# EAGLE board ACB-Lite 3.0 (EAGLE 8.6.3), part 1 of 2
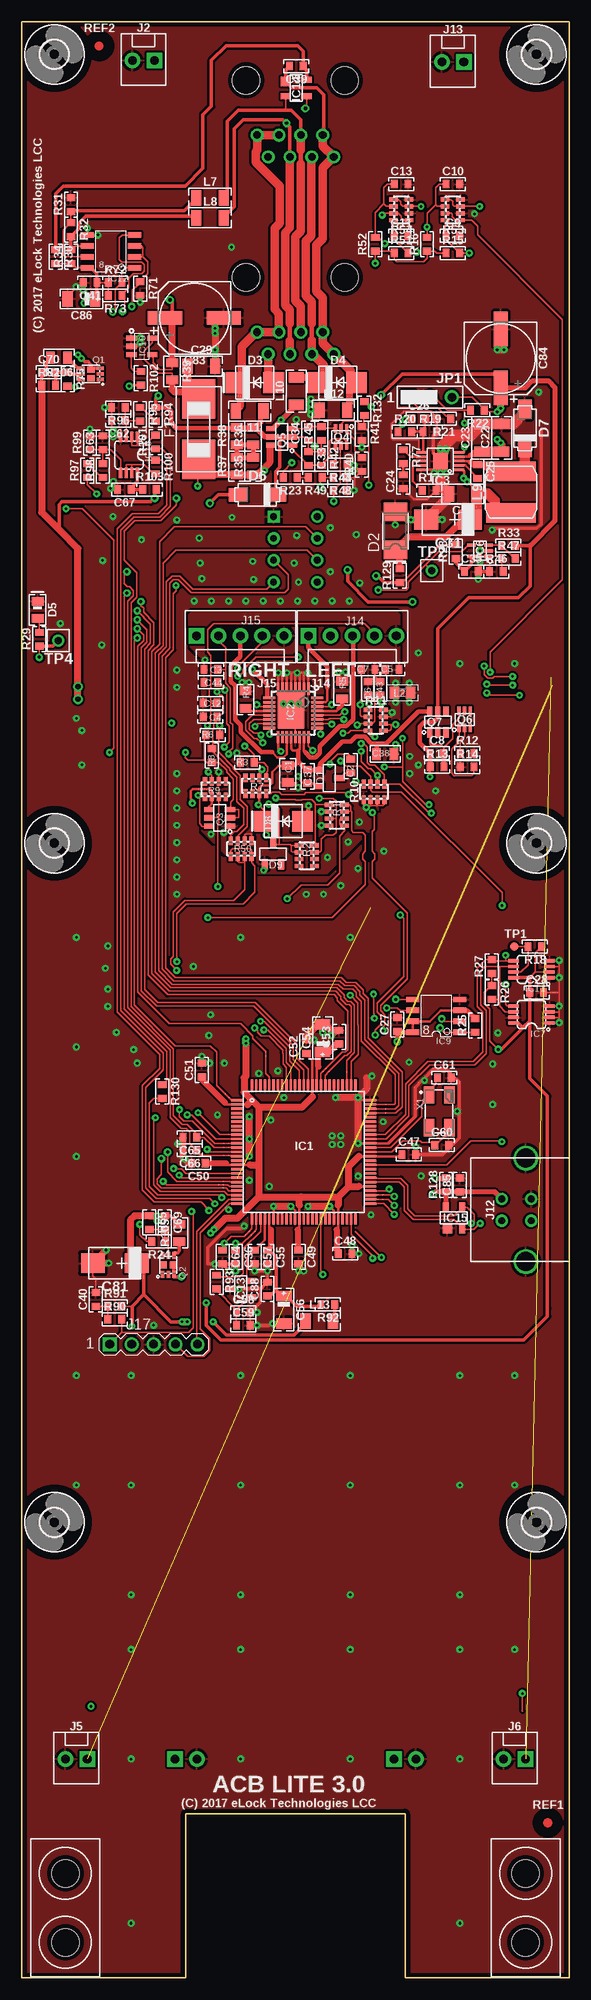
[diagram p0: board, top side]
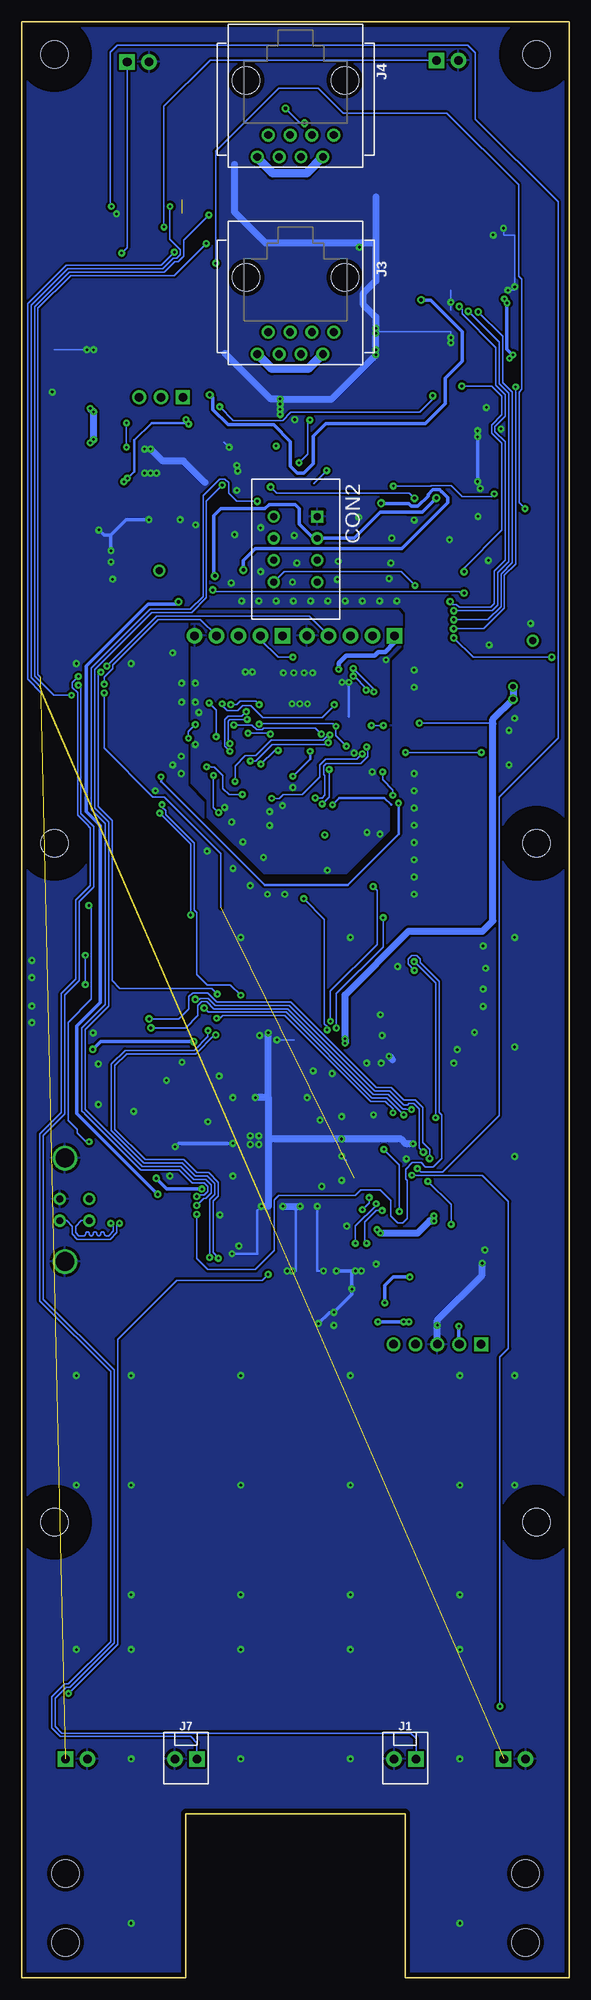
[diagram p1: board, bottom side, seen from below]

Size 63.5 x 226.82 mm. Coordinates in mm from the lower left corner, seen from the top.
Outline: 63.5,0 63.5,226.82 0,226.82 0,0 19.05,0 19.05,19.05 44.45,19.05 44.45,0 63.5,0
Copper layers (1*16): Top 0.035mm / dielectric 1.5mm / Bottom 0.035mm
Design rules "default *": minimum track width 0.2mm, minimum drill 0.3mm, track to track 0.2mm, track to pad 0.2mm, pad to pad 0.2mm, via to via 0.2mm, smd to smd 0.001mm, copper to edge 0.5mm, drill to drill 0.2mm, minimum pad ring 0.3mm, minimum via ring 0.25mm, stop-mask expansion 0.1mm, vias tented up to drill 0.6mm, thermal gap 0.35mm
Net classes: 1 HV: clearance 0.3 mm to class 0

## Footprints (pad centres in the part's own frame; a part is rotated, then mirrored left to right if it is on the bottom)
0805 = smd 0.99 x 1.39: 1 -1,0; 2 1,0
0603 = smd 0.79 x 0.99: 1 -0.8,0; 2 0.8,0
1206 = smd 1.19 x 1.79: 1 -1.6,0; 2 1.6,0
CT-C = smd 2.743 x 2.311: + -2.54,0; - 2.54,0
1206-POL-C = smd 1.19 x 1.79: + -1.6,0; - 1.6,0
CAP_8MM_DIA_SMT = smd 1.59 x 3.99: 1 0,3.4; 2 0,-3.4
166087-4 = drill 0.8 square: 1 -3.81,2.54 | drill 0.8: 2 -1.27,2.54; 3 1.27,2.54; 4 3.81,2.54; 5 3.81,-2.54; 6 1.27,-2.54; 7 -1.27,-2.54; 8 -3.81,-2.54
SOT-23 = smd 0.69 x 1.19: 1 0.95,1.2; 2 -0.95,1.2; 3 0,-1.2
SMA = smd 2.159 x 2.743: + -2.311,0.003; - 2.108,-0.002
SMB = smd 2.4 x 2.4: A 2.2,0; C -2.2,0
0805-POL-D = smd 0.99 x 1.39: A 1,0; K -1,0
SMA' = smd 2.21 x 1.575: A -2.223,0; K 2.223,0
LITTLEFUSE0154 = smd 4.6 x 3.8: 1 3.5,0; 2 -3.5,0
CAM-HOLDER = hole 3.2: 0,4; 0,-4
3,2 = hole 3.2: 0,0
TQFP100_14X14_0,5MM = smd 1.39 x 0.28: 1 -7.7,6; 2 -7.7,5.5; 3 -7.7,5; 4 -7.7,4.5; 5 -7.7,4; 6 -7.7,3.5; 7 -7.7,3; 8 -7.7,2.5; 9 -7.7,2; 10 -7.7,1.5; 11 -7.7,1; 12 -7.7,0.5; 13 -7.7,0; 14 -7.7,-0.5; 15 -7.7,-1; 16 -7.7,-1.5; 17 -7.7,-2; 18 -7.7,-2.5; 19 -7.7,-3; 20 -7.7,-3.5; 21 -7.7,-4; 22 -7.7,-4.5; 23 -7.7,-5; 24 -7.7,-5.5; 25 -7.7,-6; 51 7.7,-6; 52 7.7,-5.5; 53 7.7,-5; 54 7.7,-4.5; 55 7.7,-4; 56 7.7,-3.5; 57 7.7,-3; 58 7.7,-2.5; 59 7.7,-2; 60 7.7,-1.5; 61 7.7,-1; 62 7.7,-0.5; 63 7.7,0; 64 7.7,0.5; 65 7.7,1; 66 7.7,1.5; 67 7.7,2; 68 7.7,2.5; 69 7.7,3; 70 7.7,3.5; 71 7.7,4; 72 7.7,4.5; 73 7.7,5; 74 7.7,5.5; 75 7.7,6 | smd 0.28 x 1.39: 26 -6,-7.7; 27 -5.5,-7.7; 28 -5,-7.7; 29 -4.5,-7.7; 30 -4,-7.7; 31 -3.5,-7.7; 32 -3,-7.7; 33 -2.5,-7.7; 34 -2,-7.7; 35 -1.5,-7.7; 36 -1,-7.7; 37 -0.5,-7.7; 38 0,-7.7; 39 0.5,-7.7; 40 1,-7.7; 41 1.5,-7.7; 42 2,-7.7; 43 2.5,-7.7; 44 3,-7.7; 45 3.5,-7.7; 46 4,-7.7; 47 4.5,-7.7; 48 5,-7.7; 49 5.5,-7.7; 50 6,-7.7; 76 6,7.7; 77 5.5,7.7; 78 5,7.7; 79 4.5,7.7; 80 4,7.7; 81 3.5,7.7; 82 3,7.7; 83 2.5,7.7; 84 2,7.7; 85 1.5,7.7; 86 1,7.7; 87 0.5,7.7; 88 0,7.7; 89 -0.5,7.7; 90 -1,7.7; 91 -1.5,7.7; 92 -2,7.7; 93 -2.5,7.7; 94 -3,7.7; 95 -3.5,7.7; 96 -4,7.7; 97 -4.5,7.7; 98 -5,7.7; 99 -5.5,7.7; 100 -6,7.7
SQFP-S-5X5-32 = smd 0.3 x 1.4: 1 -1.75,-2.8; 2 -1.25,-2.8; 3 -0.75,-2.8; 4 -0.25,-2.8; 5 0.25,-2.8; 6 0.75,-2.8; 7 1.25,-2.8; 8 1.75,-2.8; 17 1.75,2.8; 18 1.25,2.8; 19 0.75,2.8; 20 0.25,2.8; 21 -0.25,2.8; 22 -0.75,2.8; 23 -1.25,2.8; 24 -1.75,2.8 | smd 1.4 x 0.3: 9 2.8,-1.75; 10 2.8,-1.25; 11 2.8,-0.75; 12 2.8,-0.25; 13 2.8,0.25; 14 2.8,0.75; 15 2.8,1.25; 16 2.8,1.75; 25 -2.8,1.75; 26 -2.8,1.25; 27 -2.8,0.75; 28 -2.8,0.25; 29 -2.8,-0.25; 30 -2.8,-0.75; 31 -2.8,-1.25; 32 -2.8,-1.75 | smd 3.1 x 4.3: G 0.25,-0.35
MSOP10EXP = smd 0.29 x 1.19: 1 -1,-2.2; 2 -0.5,-2.2; 3 0,-2.2; 4 0.5,-2.2; 5 1,-2.2; 6 1,2.2; 7 0.5,2.2; 8 0,2.2; 9 -0.5,2.2; 10 -1,2.2 | smd 1.88 x 1.68: EP 0,0
SC-70-5 = smd 0.39 x 0.99: 1 -0.65,-1; 2 0,-1; 3 0.65,-1; 4 0.65,1; 5 -0.65,1
MSOP-08 = smd 0.38 x 1.2: 1 -1,-2.1; 2 -0.35,-2.1; 3 0.3,-2.1; 4 0.95,-2.1; 5 0.95,2.1; 6 0.3,2.1; 7 -0.35,2.1; 8 -1,2.1
SO-08 = smd 0.61 x 1.524: 1 -1.905,-2.743; 2 -0.635,-2.743; 3 0.635,-2.743; 4 1.905,-2.743; 5 1.905,2.743; 6 0.635,2.743; 7 -0.635,2.743; 8 -1.905,2.743
SOT23-5 = smd 0.6 x 1.2: 1 -0.95,-1.206; 2 0,-1.206; 3 0.95,-1.206; 4 0.95,1.206; 5 -0.95,1.206
SO08 = smd 0.61 x 1.524: 1 -1.905,-2.743; 2 -0.635,-2.743; 3 0.635,-2.743; 4 1.905,-2.743; 5 1.905,2.743; 6 0.635,2.743; 7 -0.635,2.743; 8 -1.905,2.743
SOT23 = smd 0.69 x 1.19: 1 0.95,1.2; 2 -0.95,1.2; 3 0,-1.2
SOT-143 = smd 1.09 x 1.19: 1 -0.75,-1.2 | smd 0.69 x 1.19: 2 0.95,-1.2; 3 0.95,1.2; 4 -0.95,1.2
3-641215-2 = drill 1 pad 1.8 square: 1 1.27,0 | drill 1 pad 1.8: 2 -1.27,0
RJ8-8-180 = drill 0.9 pad 1.4: 1 -4.445,6.35; 2 -3.175,8.89; 3 -1.905,6.35; 4 -0.635,8.89; 5 0.635,6.35; 6 1.905,8.89; 7 3.175,6.35; 8 4.445,8.89 | hole 3.2: 5.715,0; -5.715,0
USB_B_180 = drill 0.8 pad 1.4: 1_+5V 1.25,2.8; 2_D- -1.25,2.8; 3_D+ -1.25,-0.6; 4_GND 1.25,-0.6 | drill 2.2 pad 2.8: SH1 -6,0; SH2 6,0
3-641215-5 = drill 1 pad 1.8 square: 1 5.08,0 | drill 1 pad 1.8: 2 2.54,0; 3 0,0; 4 -2.54,0; 5 -5.08,0
MA05-1 = drill 1 pad 1.6 square: 1 -5.08,0 | drill 1 pad 1.6: 2 -2.54,0; 3 0,0; 4 2.54,0; 5 5.08,0
JP3CLOSE12 = drill 1 pad 1.626 square: 1 -2.54,0 | drill 1 pad 1.626: 2 0,0; 3 2.54,0
0805-0RTOP = smd 1.092 x 1.397: 1 -0.94,0; 2 0.94,0
NR6028 = smd 2.3 x 5.7: 1 2.4,0; 2 -2.4,0
TEMP-PAD = smd 0.2 x 0.2: P$1 0,0
MICRO_FET = smd 0.4 x 0.8: 1 -0.65,-1.1; 2 0,-1.1; 3 0.65,-1.1; 4 0.65,1.1; 5 0,1.1; 6 -0.65,1.1 | smd 0.7 x 0.86: P1 -0.5,0; P2 0.5,0
SSOT-6 = smd 0.6 x 1.2: 1 -0.95,-1.2; 2 0,-1.2; 3 0.95,-1.206; 4 0.95,1.2; 5 0,1.2; 6 -0.95,1.2
SC70-6 = smd 0.39 x 0.99: 1 -0.65,-1; 2 0,-1; 3 0.65,-1; 4 0.65,1; 5 0,1; 6 -0.65,1
0603-ARRAY = smd 0.49 x 0.99: 1 -1.2,-0.9; 2 -0.4,-0.9; 3 0.4,-0.9; 4 1.2,-0.9; 5 1.2,0.9; 6 0.4,0.9; 7 -0.4,0.9; 8 -1.2,0.9
SMD_ROUND_1MM = smd 1 x 1: P$1 0,0
TH_ROUND_14MM08MM = drill 0.8 pad 1.4: P$1 0,0
7B = smd 2 x 1.2: 1 -1.9,-1.2; 2 1.9,-1.2; 3 1.9,1.2; 4 -1.9,1.2

## Placement (x,y rotation side)
C1  4.7u/16V  [0805]  30.86,139.62 270 top
C2  10nF  [0603]  38.16,140.52 90 top
C3  10nF  [0603]  21.96,151.72 180 top
C4  10nF  [0603]  21.86,146.22 180 top
C5  10nF  [0603]  42.96,151.72 0 top
C6  10nF  [0603]  40.16,149.52 90 top
C7  10nF  [0603]  40.16,151.72 0 top
C8  100n  [0603]  48.15,142 0 top
C9  10nF  [0603]  50,201.99 0 top
C10  10nF  [0603]  50,207.99 0 top
C11  10nF  [0603]  44,201.99 0 top
C12  10nF  [0603]  21.86,147.82 180 top
C13  10nF  [0603]  44,207.99 0 top
C22  4u7/50  [1206]  55.64,178.57 90 top
C23  4u7/50  [1206]  53.34,178.57 90 top
C24  1n  [0603]  44.24,173.47 90 top
C25  470n/25  [0603]  52.84,174.67 270 top
C26  10p  [0603]  46.04,180.77 0 top
C27  100n  [0603]  43.57,110.55 90 top
C28  100n  [0603]  59.71,114.27 0 top
C29  4u7/50  [1206]  20.84,186.87 0 top
C30  47u/6.3  [1206]  51.14,172.07 180 top
C31  47uTC  [CT-C]  49.44,169.07 180 top
C33  100n  [0603]  33.24,176.17 270 top
C34  1n  [0603]  33.24,179.07 90 top
C35  100n  [0603]  52.14,163.07 0 top
C36  100n  [0603]  24.81,83.57 270 top
C37  1u/16V  [0603]  33.16,139.32 270 top
C38  4.7u/16V  [0805]  42.16,141.92 0 top
C39  100n  [0603]  31.85,221.65 180 top
C40  100n  [0603]  8.61,78.67 90 top
C41  100n  [0603]  7.94,196.57 180 top
C43  10nF  [0603]  41.56,149.52 90 top
C44  10nF  [0603]  21.96,150.22 180 top
C47  100n  [0603]  44.91,95.47 0 top
C48  1u  [0603]  37.51,83.97 0 top
C49  100n  [0603]  32.11,83.57 270 top
C50  1u  [0603]  20.51,94.47 180 top
C51  100n  [0603]  20.91,105.27 90 top
C52  1u  [0603]  33.01,107.97 90 top
C53  10u  [0603]  36.81,109.07 90 top
C54  10uTA  [1206-POL-C]  34.91,108.97 90 top
C55  100n  [0603]  28.51,83.57 270 top
C56  10uTA  [1206-POL-C]  30.41,77.47 270 top
C57  100n->10n  [0603]  27.01,83.57 270 top
C58  100n  [0603]  25.71,77.17 0 top
C59  1u->100n  [0603]  25.71,75.67 0 top
C60  18p  [0603]  48.71,96.57 0 top
C61  18p  [0603]  49.01,104.37 0 top
C62  1n  [0603]  11.23,180.58 180 top
C63  1n  [0603]  9.43,177.98 90 top
C64  100n  [0603]  23.31,83.57 270 top
C65  1n  [0603]  19.51,97.47 180 top
C66  10n  [0603]  19.51,95.97 180 top
C67  10u  [0603]  11.93,172.58 180 top
C69  1n  [0603]  16.61,87.57 270 top
C70  1n  [0603]  3.14,186.17 0 top
C81  47uTC  [CT-C]  10.81,82.87 180 top
C83  220u/25V  [CAP_8MM_DIA_SMT]  20.04,192.47 90 top
C84  220u/25V  [CAP_8MM_DIA_SMT]  55.54,187.77 180 top
C85  100n  [0603]  50.81,91.94 90 top
C86  10uTA  [1206-POL-C]  6.94,194.67 180 top
C88  10u  [0603]  28.51,79.87 90 top
CON2  166087-4  [166087-4]  31.75,165.64 270 bottom
D1  BAT54S  [SOT-23]  35.66,139.12 90 top
D2  SMLVT3V3  [SMA]  43.34,167.87 90 top
D3  P6SMB20A  [SMB]  27.04,184.97 0 top
D4  P6SMB20A  [SMB]  36.64,184.97 0 top
D5  LED-GREEN  [0805-POL-D]  1.86,158.62 270 top
D6  SS14  [SMA']  27.34,171.97 0 top
D7  SS14  [SMA']  58.34,179.67 270 top
D8  P6SMB16A  [SMB]  30.36,134.12 0 top
D9  BZX84C6V2  [SOT-23]  29.16,130.32 180 top
F1  T1A-LITTLEFUSE0154  [LITTLEFUSE0154]  20.54,179.57 90 top
H1  CAM-HOLDER  [CAM-HOLDER]  58.42,8.13 0 top
H2  CAM-HOLDER  [CAM-HOLDER]  5.08,8.13 0 top
H3  MOUNT-HOLE3.2  [3,2]  3.81,223.01 0 top
H4  MOUNT-HOLE3.2  [3,2]  59.69,223.01 0 top
H5  MOUNT-HOLE3.2  [3,2]  3.81,131.57 0 top
H6  MOUNT-HOLE3.2  [3,2]  59.69,131.57 0 top
H7  MOUNT-HOLE3.2  [3,2]  3.81,52.83 0 top
H8  MOUNT-HOLE3.2  [3,2]  59.69,52.83 0 top
IC1  PIC32MX470F512L-I/PF  [TQFP100_14X14_0,5MM]  32.71,95.77 0 top
IC2  L6227Q  [SQFP-S-5X5-32]  31.49,146.66 180 top
IC3  LT3971EMSE  [MSOP10EXP]  48.54,175.87 90 top
IC6  MIC841LYC  [SC-70-5]  53.14,165.47 90 top
IC7  24LC32A-I/MS  [MSOP-08]  59.11,111.72 90 top
IC9  AT25SF321-SSHD  [SO-08]  48.07,111.55 90 top
IC10  MAX9938HEUK+T  [SOT23-5]  13.94,189.17 270 top
IC11  24LC32A-I/MS  [MSOP-08]  59.11,116.97 90 top
IC12  SN65HVD12D  [SO08]  10.34,200.17 90 top
IC13  REF3025  [SOT23]  25.41,79.87 270 top
IC14  TPD2E001DZDR  [SOT-143]  31.83,219.13 270 top
IC15  TPD2E001DZDR  [SOT-143]  50.11,88.14 0 top
IC16  MCP6042-I/MS  [MSOP-08]  12.43,176.58 180 top
J1  3-641215-2  [3-641215-2]  19.05,25.39 0 bottom
J2  3-641215-2  [3-641215-2]  14.13,222.33 0 top
J3  RJ8-8-180  [RJ8-8-180]  31.75,197.15 180 bottom
J4  RJ8-8-180  [RJ8-8-180]  31.75,220.02 180 bottom
J5  3-641215-2  [3-641215-2]  6.35,25.39 0 top
J6  3-641215-2  [3-641215-2]  57.15,25.39 0 top
J7  3-641215-2  [3-641215-2]  44.45,25.39 0 bottom
J12  USB_A_180  [USB_B_180]  58.47,89.05 90 top
J13  3-641215-2  [3-641215-2]  49.99,222.14 0 top
J14  3-641215-5  [3-641215-5]  38.36,155.62 180 top
J15  3-641215-5  [3-641215-5]  25.36,155.62 180 top
J17  DNP-open-hole  [MA05-1]  15.31,73.47 0 top
JP1  JP3CLOSE12  [JP3CLOSE12]  47.34,183.27 0 top
L2  DNP  [0805-0RTOP]  44.16,149.02 0 top
L7  HI1206T500R  [1206]  21.84,206.37 0 top
L8  HI1206T500R  [1206]  21.84,204.07 0 top
L9  NR6028T4R7M  [NR6028]  56.74,172.27 90 top
L10  HI1206T500R  [1206]  31.84,183.97 90 top
L11  HI1206T500R  [1206]  26.44,181.67 180 top
L12  HI1206T500R  [1206]  36.14,181.77 0 top
L13  LQM31PN3R3M00L  [1206]  34.51,76.17 0 top
O1  PIC-OUT  [TEMP-PAD]  24.01,102.07 0 top
O5  PIC-RPX  [TEMP-PAD]  24.01,97.77 0 top
O6  PIC-RPX  [TEMP-PAD]  24.01,96.77 0 top
O7  PIC-RPX  [TEMP-PAD]  24.01,96.27 0 top
O8  PIC-RPX  [TEMP-PAD]  24.01,95.37 0 top
O12  PIC-RPX  [TEMP-PAD]  23.41,92.37 0 top
O13  PIC-RPX  [TEMP-PAD]  23.41,91.57 0 top
O15  PIC-RPX  [TEMP-PAD]  26.41,86.57 90 top
O16  PIC-RPX  [TEMP-PAD]  27.01,86.57 0 top
O23  PIC-OUT  [TEMP-PAD]  28.31,106.87 0 top
O29  PIC-RPX  [TEMP-PAD]  31.51,106.87 0 top
O30  PIC-RPX  [TEMP-PAD]  31.91,106.87 0 top
O31  PIC-OUT  [TEMP-PAD]  34.91,105.07 0 top
O41  PIC-RPX  [TEMP-PAD]  41.86,90.77 180 top
O42  PIC-RPX  [TEMP-PAD]  41.31,90.27 180 top
O44  PIC-OUT  [TEMP-PAD]  23.41,91.97 0 top
Q1  SSM6P49NU,LFPZ  [MICRO_FET]  8.04,185.97 90 top
Q2  SSM6P49NU,LFPZ  [MICRO_FET]  17.01,82.67 0 top
Q3  FDC6330L  [SSOT-6]  22.96,134.52 90 top
Q4  FDG6303N  [SC70-6]  37.04,178.67 180 top
Q5  FDC6506P  [SSOT-6]  30.14,178.67 90 top
Q6  FDG6303N  [SC70-6]  51.36,145.92 0 top
Q7  FDC6506P  [SSOT-6]  48.26,145.62 0 top
R1  100K  [0603-ARRAY]  36.56,134.82 270 top
R2  10K  [0603-ARRAY]  33.06,130.12 270 top
R3  300R  [0603]  26.16,140.92 0 top
R4  0.12R  [0805]  25.96,148.22 270 top
R5  0.12R  [0805]  37.16,149.32 270 top
R6  2K  [0603]  22.16,144.12 0 top
R7  3.3K  [0603-ARRAY]  27.16,138.22 0 top
R8  2K  [0603]  22.06,141.72 90 top
R9  100K  [0603-ARRAY]  22.46,137.82 180 top
R10  1M  [0603-ARRAY]  40.86,137.52 0 top
R11  10K  [0603-ARRAY]  41.06,145.82 270 top
R12  1M  [0603]  51.65,142 0 top
R13  1M  [0603]  48.16,140.42 0 top
R14  300k  [0603]  51.64,140.4 0 top
R15  2K  [0603]  50,199.99 0 top
R16  2K  [0603]  47,200.99 90 top
R17  47k  [0603]  47.24,172.47 0 top
R18  10k  [0603]  59.51,119.57 180 top
R19  560k  [0603]  47.34,179.27 0 top
R20  1M  [0603]  44.44,179.27 0 top
R21  1M  [0603]  48.94,180.77 180 top
R22  4M99  [0603]  52.84,181.77 180 top
R23  1M  [0603]  31.14,173.97 180 top
R24  100k  [0603]  15.91,85.37 180 top
R25  1M  [0603]  52.57,110.45 90 top
R26  10k  [0603]  54.51,114.27 270 top
R27  10k  [0603]  54.51,117.27 90 top
R28  100R  [0603]  50.34,165.37 90 top
R29  300R  [0603]  2.06,155.22 90 top
R30  10k  [0603]  3.94,199.57 270 top
R31  1M  [0603]  5.73,205.59 90 top
R32  1M  [0603]  5.73,202.69 270 top
R33  4M99  [0603]  56.44,166.07 0 top
R34  1M  [0603]  5.74,199.57 90 top
R35  1k  [0805]  26.84,175.27 90 top
R36  1k  [0805]  26.84,178.77 90 top
R37  1k  [0805]  24.94,175.27 90 top
R38  1k  [0805]  24.94,178.77 90 top
R39  0.025R  [0805]  17.44,186.27 270 top
R40  300k  [0603]  39.44,175.47 90 top
R41  1M  [0603]  39.44,179.07 270 top
R42  1M  [0603]  34.74,176.17 270 top
R43  300k  [0603]  36.94,175.47 180 top
R44  1M  [0603]  36.94,172.47 0 top
R45  1M  [0603]  34.74,179.07 90 top
R46  560k->750k  [0603]  55.04,163.07 0 top
R47  100k->180k  [0603]  56.44,164.57 0 top
R48  1M  [0603]  36.94,173.97 180 top
R49  560k  [0603]  34.04,173.97 180 top
R50  100K  [0603-ARRAY]  25.46,130.92 0 top
R51  2K  [0603]  44,199.99 0 top
R52  2K  [0603]  41,200.99 90 top
R53  100K  [0603-ARRAY]  50,204.99 90 top
R54  100K  [0603-ARRAY]  44,204.99 90 top
R65  1M  [0603]  14.81,87.57 270 top
R71  10k  [0603]  13.74,195.87 270 top
R72  1M  [0603]  10.84,196.57 0 top
R73  1M  [0603]  10.84,195.07 180 top
R75  100k  [0603]  5.34,185.37 270 top
R77  47k  [0603]  44.24,176.37 270 top
R82  1M  [0603]  3.14,184.67 0 top
R90  1k  [0603]  10.81,76.37 0 top
R91  10k  [0603]  10.81,77.87 0 top
R92  10R  [0603]  35.51,78.07 180 top
R93  300R  [0603]  22.61,80.67 270 top
R94  180k  [0603]  15.53,181.28 270 top
R95  4M99  [0603]  13.73,181.28 270 top
R96  560k  [0603]  11.23,182.08 180 top
R97  180k  [0603]  7.63,174.78 90 top
R98  4M99  [0603]  9.43,174.78 90 top
R99  560k  [0603]  7.93,177.98 90 top
R100  2k2  [0603]  15.53,175.18 270 top
R101  2k2  [0603]  15.53,178.08 90 top
R102  1k  [0603]  13.84,185.47 270 top
R103  300R  [0603]  14.83,172.58 0 top
R105  1R  [0805]  18.31,86.37 90 top
R106  1R  [0805]  4.34,187.87 180 top
R128  10k  [0603]  49.2,91.95 90 top
R129  DNP/0R  [0603]  43.84,162.57 90 top
R130  100k  [0603]  16.31,102.77 270 top
R132  1M  [0603]  39.74,181.97 270 top
REF1  REF  [REF]  61,17.99 0 top
REF2  REF  [REF]  9,223.99 0 top
T1  PIC-OUT  [TEMP-PAD]  50.85,143.11 0 top
T3  PIC-RPX  [TEMP-PAD]  23.46,96.27 180 top
T5  PIC-OUT  [TEMP-PAD]  41.86,90.27 180 top
T7  PIC-OUT  [TEMP-PAD]  41.31,90.77 180 top
T13  PIC-RPX  [TEMP-PAD]  31.51,107.42 0 top
T14  PIC-RPX  [TEMP-PAD]  31.91,107.42 270 top
T15  PIC-OUT  [TEMP-PAD]  35.26,105.42 270 top
T27  PIC-OUT  [TEMP-PAD]  23.46,96.77 270 top
T32  PIC-OUT  [TEMP-PAD]  22.86,91.97 270 top
T33  PIC-OUT  [TEMP-PAD]  28.31,107.42 270 top
T36  PIC-OUT  [TEMP-PAD]  23.61,102.47 0 top
T37  PIN-AN  [TEMP-PAD]  26.01,86.17 0 top
T38  PIN-AN  [TEMP-PAD]  26.61,86.17 270 top
T39  PIN-AN  [TEMP-PAD]  23.46,95.37 270 top
T40  PIC-RPX  [TEMP-PAD]  42.23,100.77 90 top
T41  PIC-RPX  [TEMP-PAD]  42.23,101.27 90 top
T42  PIC-OUT  [TEMP-PAD]  42.23,100.27 90 top
T43  PIC-RPX  [TEMP-PAD]  37.71,105.06 90 top
T44  PIC-OUT  [TEMP-PAD]  35.62,105.07 90 top
T45  PIC-RPX  [TEMP-PAD]  51.44,165.77 180 top
TP1  DNP-TestPoint  [SMD_ROUND_1MM]  57.11,119.57 0 top
TP2  DNP-TestPoint  [TH_ROUND_14MM08MM]  47.54,163.17 0 top
TP4  DNP-TestPoint  [TH_ROUND_14MM08MM]  4.24,155.05 180 top
X1  8MHz-5x3.2mm  [7B]  48.41,100.47 270 top

## Library data of the parts
C1-C13 C22-C30 C33-C41 C43 C44 C47-C67 C69 C70 C85 C86 C88 D5 L2 L7 L8 L10-L13 R3-R6 R8 R12-R49 R51 R52 R65 R71-R73 R75 R77 R82 R90-R103 R105 R106 R128-R130 R132 = DISCRETE
C31 C81 D6 D7 JP1 = SmdDisc
C83 C84 = SMD-ELYT
CON2 = clackboard_lib
D1 D9 Q3-Q7 = Fairchild-AON
D2 IC2 = st-microelectronics-AOM
D3 D4 D8 = Littelfuse
F1 IC6 = ArdDisp
H1 H2 IC1 IC3 IC13 J3 J4 J12 = ACB
H3-H8 = holes
IC7 IC11 IC16 = Microchip-AON
IC9 = Micron-U
IC10 = Touchstone-U
IC12 = TexasInstruments-AON
IC14 IC15 = Semtech-AOM
J1 J2 J5-J7 J13-J15 = Tyco-U
J17 = CON-pinHeader-AON
L9 = Sumida-UT
O1 O5-O8 O12 O13 O15 O16 O23 O29-O31 O41 O42 O44 T1 T3 T5 T7 T13-T15 T27 T32 T33 T36-T45 TP1 TP2 TP4 = TESTPAD
Q1 Q2 = Toshiba-AON
R1 R2 R7 R9-R11 R50 R53 R54 = Panasonic-AON
REF1 REF2 = technol
X1 = TXC_Tech-U

## Nets
+3,3V-FILT: C35.1 IC6.5 R28.1
+3.3V: C47.1 C48.1 C49.1 C50.1 C51.1 C52.1 C69.1 C70.1 C81.+ CON2.2 IC1.2 IC1.16 IC1.37 IC1.46 IC1.55 IC1.62 IC1.86 J17.2 L13.1 R28.2 R65.1 R82.1 R91.2 R103.2 R105.2 R106.2 R129.1
+3.3V/1: C27.1 C28.1 IC7.8 IC9.3 IC9.7 IC9.8 IC11.2 IC11.8 Q2.3 Q2.P2 R18.1 R25.2 R26.1 R27.1
+3.3V/2: C41.1 C86.+ IC12.8 Q1.3 Q1.P2 R30.2 R34.1 R72.1 R73.2
/3.3V1PWRON: IC1.21 O44.P$1 R24.2 T32.P$1
/3.3V2PWRON: IC1.96 O23.P$1 R75.2 T33.P$1
/FMEM1-CS: IC1.11 IC9.1 O6.P$1 R25.1 T27.P$1
/MCLR: IC1.13 J17.1 R90.2
A+ [HV]: IC14.3 J3.4 J4.4 L8.2
A++ [HV]: IC12.6 L8.1 R32.2 R34.2
ACT-L-SENSE: IC1.92 R1.7 R1.8
ACT-L-SW: C44.1 J14.2 R1.1 R2.8
ACT-R-SENSE: IC1.91 R1.5 R1.6
ACT-R-SW: C3.1 J15.2 R1.3 R2.7
ACT_EN: IC1.77 R7.4 R11.5 R11.6
ACT_L1: IC1.49 IC2.27 R10.5
ACT_L2: IC2.28 R10.6
ACT_L+: IC2.31 J14.1
ACT_L-: IC2.23 J14.3
ACT_R1: IC1.60 IC2.13 R10.7
ACT_R2: IC2.14 R10.8
ACT_R+: IC2.9 J15.1
ACT_R-: IC2.19 J15.3
AVDD: C55.1 C56.+ C88.1 IC1.30 R92.2
B- [HV]: IC14.2 J3.5 J4.5 L7.2
B-- [HV]: IC12.7 L7.1 R31.1 R32.1
BT-RTS: CON2.7 IC1.83 T44.P$1
BT-RX: CON2.3 IC1.73 T40.P$1
BT-TX: CON2.4 IC1.74 T41.P$1
CON-LED: CON2.6 IC1.78 T43.P$1
CURR-SENSE: C66.1 IC1.14 O8.P$1 R102.2 T39.P$1
D_N: IC1.56 IC15.2 J12.2_D-
D_P: IC1.57 IC15.3 J12.3_D+
DGND [GND]: C9.2 C10.2 C11.2 C13.2 C22.2 C23.2 C24.1 C27.2 C28.2 C29.2 C30.2 C31.- C35.2 C36.2 C40.2 C41.2 C47.2 C48.2 C49.2 C50.2 C51.2 C52.2 C53.2 C54.- C55.2 C56.- C57.2 C58.2 C59.2 C60.2 C61.2 C62.2 C63.2 C64.2 C65.2 C66.2 C67.2 C81.- C83.2 C84.2 C85.2 C86.- C88.2 CON2.1 D2.- D5.K D7.A IC1.15 IC1.31 IC1.36 IC1.45 IC1.65 IC1.75 IC3.10 IC3.EP IC6.2 IC7.1 IC7.2 IC7.3 IC7.4 IC7.7 IC9.4 IC10.1 IC10.2 IC11.1 IC11.3 IC11.4 IC12.5 IC13.3 IC15.1 IC16.4 J1.2 J2.2 J5.2 J6.2 J7.2 J12.4_GND J12.SH1 J12.SH2 J13.2 J17.3 L2.2 L12.1 R12.2 R14.1 R17.2 R19.2 R21.2 R31.2 R40.1 R41.2 R43.1 R44.2 R46.1 R48.1 R53.2 R53.4 R54.2 R54.4 R71.2 R96.2 R99.2
DGND-F [HV]: C39.2 D3.A D4.A IC14.1 J3.2 J3.7 J3.8 J4.2 J4.7 J4.8 L12.2
DOOR_L: IC1.51 R50.2 R50.3
DOOR_L_SW: C12.1 J1.1 J14.4 R6.2 R50.7
DOOR_ON: IC1.89 Q3.5 R9.7
DOOR_R: IC1.23 R50.1 R50.4
DOOR_R_SW: C4.1 J7.1 J15.4 R8.2 R50.8
GATE-Q12A: C33.2 Q4.6 Q5.1 R42.2
GATE-Q12A1: C8.2 Q6.6 Q7.1 R13.2
GATE-Q12B: C34.2 Q4.3 Q5.3 R45.2
LAN-CTL: IC1.84 IC12.2 IC12.3 O31.P$1 R71.1 T15.P$1
LAN-RX: IC1.88 IC12.1 O29.P$1 R72.2 T13.P$1
LAN-TX: IC1.87 IC12.4 O30.P$1 R73.1 T14.P$1
LED-PIC: IC1.1 O1.P$1 R29.1 T36.P$1 TP4.P$1
N$1: C5.1 IC2.25 R11.4
N$2: C43.1 IC2.16 R11.3
N$3: C6.1 IC2.11 R11.1
N$4: Q6.1 R14.2
N$5: C9.1 J13.1 R15.2 R53.8
N$6: C2.2 IC2.24
N$8: C10.1 J2.1 R16.2 R53.6
N$9: C11.1 J5.1 R51.2 R54.8
N$10: C13.1 J6.1 R52.2 R54.6
N$13: IC11.7 R18.2 TP1.P$1
N$14: D5.A R29.2
N$16: Q4.1 R40.2
N$17: Q4.4 R43.2
N$18: C39.1 IC14.4 R30.1
N$19: C2.1 D1.3
N$20 [HV]: R35.2 R36.1 R37.2 R38.1
N$21 [HV]: C29.1 F1.1 IC10.5 R39.2
N$24: L13.2 R92.1
N$27: IC6.1 R46.2 R47.1
N$28: IC6.3 R33.1 R47.2
N$29: D9.3 R2.1 R2.2 R7.6
N$31: IC2.12 R4.2
N$32: C61.1 IC1.64 X1.1
N$35: Q3.6 R9.3
N$36: Q1.4 R106.1
N$38 [HV]: F1.2 Q5.6 R35.1 R37.1 R97.1
N$39: C60.1 IC1.63 X1.3
N$40: Q3.2 Q3.3 R6.1 R8.1 R15.1 R16.1 R51.1 R52.1
N$41: IC2.29 R5.2
N$44: C58.1 C59.1 IC13.1 R93.2
N$47: C37.2 D1.2 IC2.17
N$48: R94.2 R95.1
N$49: C62.1 IC16.3 R95.2 R96.1
N$50: C26.2 IC3.6 R19.1 R20.2
N$51: C24.2 R77.2
N$52 [HV]: C25.1 D7.K IC3.3 L9.1
N$53: IC3.8 R17.1
N$54: IC3.7 R77.1
N$55 [HV]: IC3.5 JP1.2 R22.2
N$56: Q2.4 R105.1
N$57 [HV]: C25.2 IC3.2
N$60: R97.2 R98.1
N$62: R23.1 R49.2
N$63: C63.1 IC16.5 R98.2 R99.1
N$64: IC16.6 IC16.7 R100.2
N$65: C67.1 IC16.8 R103.1
N$66: IC16.1 IC16.2 R101.2
N$67: C69.2 Q2.5 R24.1 R65.2
N$68: IC10.3 R102.1
N$70: C40.1 R90.1 R91.1
N$71: C7.1 IC2.30 R11.2
N$73: C70.2 Q1.5 R75.1 R82.2
N$78: IC2.15 IC2.26 R3.2 R7.5
N$85 [HV]: C85.1 D6.A IC15.4 J12.1_+5V R128.1
N$87 [HV]: JP1.1 R21.1
OUT+3.3V [GND]: C26.1 C30.1 C31.+ D2.+ IC3.1 L9.2 R20.1 R129.2
PAL1: IC1.9 O5.P$1 R53.1 R53.7
PAL2: IC1.18 R53.3 R53.5
PAL3: IC1.19 R54.1 R54.7
PAL4: IC1.42 R54.3 R54.5
PGC: IC1.24 J17.5
PGD: IC1.25 J17.4 R130.2
PGND: C1.2 C3.2 C4.2 C5.2 C6.2 C7.2 C12.2 C38.2 C43.2 C44.2 D8.A D9.1 IC2.1 IC2.2 IC2.3 IC2.4 IC2.5 IC2.6 IC2.7 IC2.8 IC2.21 IC2.G J14.5 J15.5 L2.1 Q3.1 R1.2 R1.4 R3.1 R4.1 R5.1 R9.2 R10.1 R10.2 R10.3 R10.4 R11.7 R11.8 R50.5 R50.6
POWER-GOOD: IC6.4 R130.1 T45.P$1 TP2.P$1
REF2,5V: C57.1 IC1.29 IC13.2
REF-EN: IC1.28 R93.1
SCL1-EEPROM: IC1.66 IC7.6 IC11.6 R26.2
SCLK2-SPI: IC1.10 IC9.6
SDA1-EEPROM: IC1.67 IC7.5 IC11.5 R27.2
SDI2-MISO: IC1.22 IC9.2 O13.P$1
SDO2-MOSI: IC1.20 IC9.5 O12.P$1
VACT: C1.1 C37.1 C38.1 D1.1 D8.C IC2.20 IC2.22 Q7.6 R7.3
VACT-ON: Q6.2 R12.1 T1.P$1
VBAT [HV]: C8.1 C22.1 C23.1 C83.1 C84.1 IC3.4 IC10.4 JP1.3 Q3.4 Q7.5 R9.6 R13.1 R22.1 R33.2 R39.1
VBAT-LAN [HV]: D3.C J3.1 J3.3 J4.1 J4.3 L11.2
VBAT-LAN-F [HV]: C33.1 C34.1 D6.K L11.1 Q5.2 Q5.5 R36.2 R38.2 R42.1 R45.1 R94.1 R132.1
VBAT-ON: IC1.52 O42.P$1 Q4.2 R41.1 R132.2 T5.P$1
VBAT-SENSE: C64.1 IC1.26 O15.P$1 R100.1 T37.P$1
VBATLAN-SENSE: C36.1 IC1.27 O16.P$1 R101.1 T38.P$1
VBUS: IC1.54 R128.2
VCAP: C53.1 C54.+ IC1.85
VPS-ON: IC1.53 O41.P$1 Q4.5 R44.1 T7.P$1
VPS-PWR [HV]: D4.C J3.6 J4.6 L10.2
VPS-PWR-F: L10.1 Q5.4 R23.2
VPS-SENSE: C65.1 IC1.12 O7.P$1 R48.2 R49.1 T3.P$1
WAKE-SW: CON2.5 IC1.72 T42.P$1

## Tracks (layer width: path | path; a pad name or v marks a point on that pad's centre or on a via)
+3,3V-FILT
  Top 0.4: R28.1 50.34,164.07 C35.1 52.14,163.87 IC6.5
+3.3V  (via drill 0.3, 0.3 pad 0.7, 0.3 pad 0.8, 0.4, 0.4 pad 0.8, 0.6)
  Top 0.2: R105.2 18.51,87.37 | 12.81,77.87 R91.2 | R129.1 43.94,161.87 44.24,161.87 48.54,166.17 R28.2 | R103.2 15.43,172.38 v15.43,171.58 | 17.41,145.51 v17.39,145.49
  Top 0.28: C47.1 44.31,95.27 IC1.62 39.11,95.27 | 23.61,101.47 23.61,101.27 IC1.2 26.21,101.27 | 23.71,94.47 23.71,94.27 IC1.16 26.51,94.27 | 32.01,86.77 32.21,86.77 IC1.37 32.21,89.57 | 32.01,84.77 32.01,84.37 C49.1 | 36.51,86.77 36.71,86.77 IC1.46 36.71,89.57 | IC1.55 39.11,91.77 | C52.1 33.01,107.07 33.71,106.37 IC1.86 33.71,102.17
  Top 0.3: C69.1 16.51,88.37
  Top 0.4: R82.1 C70.1 2.84,186.67 2.84,187.17 3.34,187.67 R106.2 3.34,188.07 | v15.71,88.37 C69.1 17.31,88.37 R105.2 | v12.81,75.57 12.81,77.87 14.16,79.22 | 14.16,79.22 14.16,82.06 C81.+ | v22.21,76.07 23.71,74.57 31.61,74.57 32.91,75.87 L13.1 | v18.61,76.07 17.31,76.07 14.16,79.22 | v15.43,171.58 14.99,171.14 4.65,171.14 4.35,170.84 4.35,167.93 | R129.1 42.05,161.78 41.3,162.54 v41.1,162.54
  Top 0.68: C51.1 20.91,104.17 23.61,101.47 | C50.1 23.71,94.47 | 32.01,86.77 32.01,84.77 | 36.51,86.77 36.51,84.47 36.71,84.27 C48.1
  Top 0.8: R28.2 50.24,166.17 | C81.+ 12.61,82.87 12.61,87.87 13.11,88.37 R65.1 v15.71,88.37 v15.71,87.77 | 26.71,101.77 25.81,102.67 25.81,104.37 26.01,104.57 v26.01,108.37 v26.01,108.87 | 26.21,101.27 26.71,101.77 | 26.71,101.77 27.51,100.97 | 27.51,100.97 27.51,94.27 | 27.51,94.27 27.51,90.57 | 27.51,90.57 25.01,88.07 23.61,88.07 v22.31,86.77 | 27.51,100.97 32.51,100.97 33.71,102.17 | 27.51,90.57 32.41,90.57 | 32.41,90.57 36.71,90.57 | 36.71,90.57 37.91,91.77 | 37.91,91.77 37.91,94.07 39.11,95.27 | 37.91,91.77 39.11,91.77 | 36.71,90.57 36.71,89.57 | 32.21,89.57 32.21,90.37 32.41,90.57 | 26.51,94.27 27.51,94.27 | 18.81,76.07 v18.61,76.07 v19.21,76.07 | v6.54,148.26 v6.54,149.72 6.54,165.74 4.35,167.93 2.34,169.93 R82.1
  Bottom 0.2: v17.39,145.49 8.96,145.49 8.86,145.39
  Bottom 0.4: J17.2 12.81,73.51 v12.81,75.57 | v19.21,76.07 v22.21,76.07 | 18.63,169.94 18.63,169.93 | 18.63,169.93 17.08,169.93 v15.43,171.58 | 18.63,169.93 21.9,169.93 24.93,166.91 CON2.2 29.67,166.91 31.3,168.54 31.3,170.34 31.8,170.84 34.8,170.84 35.3,170.34 40.4,170.34 41.2,169.54 41.2,162.64 v41.1,162.54
  Bottom 0.8: v26.01,108.37 v26.01,108.87 26.01,113.98 18.63,121.36 10.05,121.36 8.86,122.55 8.86,145.39 8.86,145.94 v6.54,148.26 | v22.31,86.77 v21.91,86.37 17.61,86.37 16.21,87.77 v15.71,87.77 v15.71,88.37 | v6.54,149.72 6.54,148.35 6.51,148.32
+3.3V/1  (via drill 0.3 pad 0.7, 0.35)
  Top 0.2: R26.1 54.51,115.17 | R27.1 54.51,115.17 | 54.51,115.17 53.61,114.27 53.61,112.97 54.26,112.32 54.26,108.65 v55.25,107.66 | IC11.2 59.56,116.62 | 59.56,116.62 58.91,115.97 | R18.1 59.56,118.82 59.56,116.62 | 57.86,109.82 57.86,109.92
  Top 0.3: IC9.3 48.6,112.18 47.33,110.91 IC9.7 45.32,109.78 45.19,109.64 | IC9.8 45.19,109.64 | 45.19,109.64 43.68,109.64
  Top 0.4: v21.41,78.27 21.41,75.67 23.11,73.97 58.21,73.97 60.95,76.71 60.95,77.65 | Q2.P2 17.66,82.67 Q2.3 17.66,81.27 v18.51,81.27 | IC11.8 58.91,115.97 C28.1 58.91,110.97 | 58.91,110.97 58.11,110.17 | 58.11,110.17 57.86,109.92 55.6,107.66 v55.25,107.66 | IC7.8 57.56,110.72 58.11,110.17 | 60.95,77.65 | 60.95,77.65 60.95,102.23 58.91,104.27 58.91,110.97 | v43.55,108.56 43.55,109.5
  Top 0.5: R25.2 51.63,112.18 IC9.3 | C27.1 43.55,109.73 | 43.55,109.73 v43.55,108.56 | IC9.8 43.63,109.64 43.55,109.73
  Bottom 0.4: v18.51,81.27 20.41,81.27 21.41,80.27 v21.41,78.27 | v55.25,107.66 54.35,108.56 v43.55,108.56
+3.3V/2  (via drill 0.3 pad 0.8)
  Top 0.2: C41.1 R72.1 R73.2 | R30.2 R34.1 5.84,198.77 6.34,198.26 IC12.8
  Top 0.3: 8.19,186.62 Q1.P2
  Top 0.4: Q1.3 8.19,186.62 | Q1.P2 8.04,187.07 7.74,187.37 7.34,187.37 v6.94,187.77 v6.54,188.17 | v7.24,194.17 7.24,194.37 v7.54,194.67 C86.+ 8.74,194.87 C41.1 8.74,197.57 8.04,198.26 IC12.8
  Bottom 0.4: v6.54,188.17 7.24,188.87 v7.24,194.17
/3.3V1PWRON  (via drill 0.3 pad 0.7)
  Top 0.2: v13.71,87.37 13.71,86.17 14.51,85.37 R24.2 | IC1.21 24.11,91.77 23.91,91.97 O44.P$1 T32.P$1 16.81,91.97 v16.41,92.37
  Bottom 0.2: v13.71,87.37 13.71,89.67 v16.41,92.37
/3.3V2PWRON  (via drill 0.3 pad 0.8, 0.35)
  Top 0.2: R75.2 5.44,184.47 v6.24,184.47 | IC1.96 28.71,104.47 28.31,104.87 O23.P$1 T33.P$1 26.8,108.93 26.8,109.24 25.4,110.64 17.14,110.64 13.49,114.29 13.49,154.42 14.14,155.07 14.14,155.7 v13.42,156.42
  Bottom 0.2: 13.42,156.4 v13.42,156.42 9.94,156.42 7.53,158.83 7.53,162.62 6.24,163.9 v6.24,184.47
/FMEM1-CS  (via drill 0.3 pad 0.7, 0.35)
  Top 0.2: IC1.11 O6.P$1 T27.P$1 22.41,96.77 19.81,99.37 18.81,99.37 18.31,99.87 v18.31,100.67 | v48.51,110.15 49.01,109.64 IC9.1 52.55,109.64
  Top 0.5: R25.1 52.55,109.64
  Bottom 0.2: v48.51,110.15 44.5,110.15 43.06,111.58 43.06,112.76 42.64,113.18 42.04,113.18 41.22,112.37 32.65,112.37 22.72,102.44 21.01,102.44 19.34,100.77 18.92,100.77 18.82,100.67 v18.31,100.67
/MCLR  (via drill 0.3 pad 0.7)
  Top 0.2: IC1.13 21.81,95.77 v21.51,96.07 | 11.63,74.87 19.41,74.87 19.91,75.37 19.91,88.67 v19.71,88.87 | 11.63,74.87 J17.1 | 11.63,74.87 11.63,76.35 R90.2
  Bottom 0.2: v19.71,88.87 19.71,94.27 v21.51,96.07
A+  (via drill 0.4)
  Top 0.2: IC14.3 33.03,216.87 v32.9,216.74
  Top 0.4: L8.2 23.44,204.17 24.64,205.37 24.64,214.38 25.7,215.44 30.3,215.44 v30.7,215.04 31.1,214.63 J4.4
  Top 0.5: 31.1,189.84 31.1,191.77
  Top 1: 31.1,191.77 31.1,193.4 30.54,193.97 30.54,202.37 31.1,202.93 J4.4 | J3.4 31.11,189.84 31.1,189.84
  Bottom 0.2: v32.9,216.74 31.2,215.04 v30.7,215.04
A++
  Top 0.2: R34.2 5.84,200.37 6.24,200.77 7.56,200.77 IC12.6
  Top 0.4: L8.1 20.04,204.27 7.46,204.27 6.62,203.43 6.62,202.79 R32.2 R34.2
ACT-L-SENSE  (via drill 0.3)
  Top 0.2: R1.8 37.96,136.02 38.16,135.82 38.16,135.32 | 38.16,135.32 38.26,135.22 38.26,133.02 38.46,132.82 39.56,132.82 39.86,132.52 39.86,130.63 39.56,130.33 39.56,129.75 39.86,129.45 39.86,126.8 36,122.94 v21.6,122.94 | R1.7 38.06,135.22 38.16,135.32 | IC1.92 30.71,105.57 30.31,105.97 30.31,107.16 30.3,107.17 30.3,107.61 28.69,109.22 27.79,109.22 27.38,109.63 27.38,109.76 v27.01,110.14
  Bottom 0.2: v27.01,110.14 27.01,110.62 27,110.63 27,114.14 21.6,119.54 v21.6,122.94
ACT-L-SW  (via drill 0.3 pad 0.7)
  Top 0.2: v32.06,153.12 27.16,153.12 25.66,151.62 25.66,151.32 25.26,150.92 v25.06,150.92 | R2.8 34.06,131.42 34.06,136.02 | 34.06,136.02 R1.1 | 34.06,136.02 34.06,136.22 33.66,136.62 32.51,136.62 32.46,136.57 31.81,136.57 31.76,136.62 29.96,136.62 29.76,136.82 v29.46,136.82 | v23.51,142.72 24.06,143.27 24.06,145.12 23.76,145.42 23.76,149.12 v23.56,149.32 23.56,149.52 22.86,150.22 C44.1
  Bottom 0.2: J14.2 35.82,155.18 33.76,153.12 v32.06,153.12 | v23.56,149.32 23.56,149.52 24.96,150.92 v25.06,150.92 | v29.46,136.82 28.66,136.82 28.36,137.12 28.36,139.42 28.46,139.52 28.46,139.54 28.48,139.56 28.48,140.5 28.16,140.82 24.16,140.82 23.36,141.62 23.36,142.57 v23.51,142.72
ACT-R-SENSE  (via drill 0.3)
  Top 0.2: R1.6 36.96,134.42 36.86,134.32 36.86,133.72 36.96,133.62 R1.5 37.46,133.02 36.86,132.42 36.86,128.1 35.5,126.74 32.4,126.74 v30.8,125.14 | IC1.91 31.21,105.64 30.71,106.14 30.71,107.33 30.7,107.34 30.7,107.78 28.56,109.92 v28.08,109.92
  Bottom 0.2: v28.08,109.92 28.08,110.31 28.4,110.63 28.4,122.74 v30.8,125.14
ACT-R-SW  (via drill 0.3 pad 0.7)
  Top 0.2: J15.2 22.82,155.06 23.66,154.22 23.66,151.72 | 36.46,134.42 36.46,132.82 36.16,132.52 35.26,132.52 34.76,132.02 34.76,130.72 34.56,130.52 R2.7 | 36.46,134.42 R1.3 | 36.46,134.42 36.46,136.47 36.16,136.77 v34.51,136.77 | 23.66,151.72 23.66,150.12 24.21,149.57 24.21,145.57 24.46,145.32 24.46,142.62 24.06,142.22 24.06,141.97 v24.01,141.92 | C3.1 23.66,151.72
  Bottom 0.2: v34.51,136.77 33.61,136.77 33.16,137.22 30.96,137.22 28.96,139.22 28.96,140.62 28.26,141.32 24.66,141.32 24.06,141.92 v24.01,141.92
ACT_EN  (via drill 0.3, 0.3 pad 0.7)
  Top 0.2: 44.16,140.42 v44.16,143.72 | 42.76,145.32 42.06,145.32 R11.6 | v43.36,145.32 42.76,145.32 | R11.5 42.66,144.62 42.86,144.82 42.86,145.22 42.76,145.32 | v37.91,137.22 37.71,137.42 32.96,137.42 32.76,137.22 30.16,137.22 29.86,137.52 29.06,137.52 28.86,137.32 R7.4 | v42.06,140.42 44.16,140.42 | 44.16,140.42 44.16,138.72 46.84,136.04 v47.23,136.04 | IC1.77 38.21,106.25 39,107.04 39,110.47 38.99,110.48 38.99,113.05 v38.1,113.94
  Bottom 0.2: v44.16,143.72 44.16,144.52 v43.36,145.32 | v37.91,137.22 39.46,137.22 40.16,137.92 40.16,139.42 41.16,140.42 v42.06,140.42 | v38.1,113.94 39.3,115.14 42,115.14 43.2,116.34 43.2,123.53 43.5,123.83 43.5,131.6 46.8,134.9 46.8,135.33 47.23,135.76 v47.23,136.04
ACT_L1  (via drill 0.3, 0.3 pad 0.7)
  Top 0.2: IC2.27 35.55,145.91 35.66,146.02 37.26,146.02 v37.36,145.92 | v39.36,143.12 39.66,143.12 40.06,142.72 40.06,140.92 40.36,140.62 40.96,140.62 42.06,139.52 R10.5 43.86,138.42 47.24,135.04 v47.5,135.04 | IC1.49 38.21,86.23 40.7,83.74 v40.7,83.44 | v43.9,123.24 44.3,122.84 44.3,116.1 41.21,113.02 41.21,111.99 41.7,111.51 41.7,110.63 41,109.93 v41,109.32
  Bottom 0.2: v37.36,145.92 39.36,145.92 39.56,145.72 39.56,143.32 v39.36,143.12 | v40.7,83.44 41,83.74 41,83.83 41.3,84.13 41.3,90.09 40.71,90.68 40.71,92.25 41.82,93.37 43.21,93.37 44.72,94.88 49.18,94.88 52.7,98.4 52.7,105.77 51.33,107.14 43.33,107.14 41.15,109.32 v41,109.32 | v43.9,123.24 43.9,131.44 v47.5,135.04
ACT_L2  (via drill 0.3, 0.3 pad 0.7)
  Top 0.2: IC2.28 35.15,146.41 35.16,146.42 36.86,146.42 37.26,146.82 v37.46,146.82 | v39.36,142.22 39.36,141.02 40.16,140.22 40.46,140.22 v41.26,139.42 R10.6 | v40.66,135.12 40.86,134.92 40.86,133.12 40.66,132.92 40.66,130.63 40.96,130.33 40.96,129.75 40.66,129.45 40.66,127.52 44.7,123.48 44.7,115.84 41.61,112.76 41.61,112.16 42.1,111.67 42.1,110.46 41.9,110.26 v41.9,109.84 | 38.71,86.53 v41.7,83.54
  Bottom 0.2: v37.46,146.82 37.96,146.32 39.56,146.32 39.96,145.92 39.96,143.38 39.98,143.36 39.98,142.84 v39.36,142.22 | v41.26,139.42 41.26,135.72 v40.66,135.12 | v41.7,83.54 41.7,90.25 41.11,90.85 41.11,92.09 41.98,92.97 43.38,92.97 44.89,94.48 49.34,94.48 53.1,98.23 53.1,105.94 51.5,107.54 43.5,107.54 41.9,109.14 v41.9,109.84
ACT_L+
  Top 0.3: IC2.31 35.25,147.91 35.46,148.12 35.46,149.62
  Top 0.5: 35.46,149.62 35.46,152.02 33.26,154.22 33.26,155.6 J14.1
ACT_L-
  Top 0.3: IC2.23 32.74,142.24 32.86,142.12
  Top 0.5: 32.86,142.12 33.46,141.52 34.06,141.52 34.56,142.02 34.56,142.82 36.86,145.12 37.66,145.12 38.46,145.92 38.46,155.52 J14.3
ACT_R1  (via drill 0.3, 0.3 pad 0.7)
  Top 0.2: IC2.13 26.75,146.41 26.01,145.67 26.01,144.67 26.96,143.72 27.26,143.72 27.76,143.22 v27.96,143.22 | v36.98,141.1 37.56,140.52 39.26,140.52 40.46,139.32 R10.7 40.46,137.72 40.66,137.52 44.03,137.52 55.7,125.85 v55.7,124.34 | IC1.60 49.27,94.27 52.05,97.05 55.59,97.05 v55.68,96.96
  Bottom 0.2: v27.96,143.22 28.16,143.02 34.46,143.02 36.38,141.1 v36.98,141.1 | v55.7,124.34 55.4,124.34 55.4,113.5 58.1,110.8 58.1,99.41 57.05,98.36 57.05,97.94 56.07,96.96 v55.68,96.96
ACT_R2  (via drill 0.3 pad 0.7)
  Top 0.2: IC2.14 26.9,145.91 26.41,145.42 26.41,144.82 26.91,144.32 27.56,144.32 v27.76,144.12 | R10.8 39.06,138.42 v38.76,138.72
  Bottom 0.2: v27.76,144.12 27.96,144.12 28.56,143.52 34.56,143.52 36.36,141.72 37.56,141.72 38.76,140.52 v38.76,138.72
ACT_R+  (via drill 0.3 pad 0.7)
  Top 0.3: 28.46,148.52 28.46,148.41 IC2.9
  Top 0.5: 28.46,148.52 28.46,150.02 v26.76,151.72
  Bottom 0.5: v26.76,151.72 26.76,152.42 25.86,153.32 22.56,153.32 22.16,153.72 21.36,153.72 20.28,154.8 J15.1
ACT_R-
  Top 0.3: IC2.19 30.74,141.9 30.36,141.52 29.66,141.52 29.06,142.12
  Top 0.5: 29.06,142.12 27.76,142.12 25.41,144.47 25.41,145.27 24.76,145.92 24.76,149.82 24.26,150.32 24.26,152.12 25.36,153.22 J15.3
AVDD
  Top 0.28: IC1.30 28.71,86.77 28.91,86.77
  Top 0.4: C55.1 28.71,84.37 29.51,83.57 29.51,79.77 | 29.51,79.77 30.21,79.07 C56.+ 30.71,79.07 31.91,77.87 34.71,77.87 R92.2 | C88.1 28.81,79.07 29.51,79.77
  Top 0.6: 28.91,84.87 28.91,84.77 C55.1
  Top 0.68: 28.91,86.77 28.91,84.87
B-
  Top 0.2: IC14.2 30.63,216.58 30.62,216.57
  Top 0.4: L7.2 23.44,206.77 23.84,207.17 23.84,215.28 25.13,216.57 30.62,216.57 31.27,216.57 32.38,215.45 J4.5 | J3.5
  Top 0.5: 32.38,211.91 32.38,210.35 32.37,210.34
  Top 1: J3.5 32.37,193.83 31.74,194.47 31.74,201.87 32.37,202.5 32.37,210.34 | J4.5 32.38,211.91
B--
  Top 0.2: IC12.7 7.56,199.57 5.04,199.57 4.84,199.77 4.84,202.66 5.73,203.55 | R31.1 5.73,203.55 | 5.73,203.55 R32.1
  Top 0.4: L7.1 19.84,205.97 19.84,205.87 18.84,204.87 5.79,204.87
  Top 0.5: R31.1 5.79,204.85 5.79,204.87
BT-RTS
  Top 0.2: IC1.83 35.21,104.66 T44.P$1 37.48,106.93 37.67,106.93 38.19,107.44 38.19,112.61 37.96,112.84 37.64,112.84 37,113.48 37,113.8 36.39,114.41 17.14,114.41 15.09,116.46 15.09,153.75 16,154.66 16,166.54 17.7,168.24 32.96,168.24 CON2.7
BT-RX
  Top 0.2: IC1.73 T40.P$1 | T40.P$1 | T40.P$1 43.3,100.77 43.71,101.18 43.71,104.88 39.8,108.79 39.8,110.8 39.79,110.81 39.79,113.38 39.2,113.97 39.2,114.39 38.55,115.04 37.46,115.04 36.89,115.61 17.63,115.61 16.29,116.95 16.29,153.26 17.2,154.17 17.2,161.73 17.61,162.14 18.19,162.14 19.69,160.64 30.5,160.64 30.9,161.04 30.9,162.68 CON2.3
BT-TX
  Top 0.2: IC1.74 T41.P$1 | T41.P$1 | T41.P$1 43.19,101.27 43.31,101.39 43.31,104.72 39.4,108.63 39.4,110.64 39.39,110.65 39.39,113.21 38.8,113.8 38.8,114.23 38.39,114.64 37.29,114.64 36.72,115.21 17.47,115.21 15.89,116.79 15.89,153.42 16.8,154.33 16.8,161.89 17.44,162.54 18.35,162.54 19.85,161.04 28.42,161.04 CON2.4
CON-LED
  Top 0.2: IC1.78 T43.P$1 37.71,106.4 38.59,107.28 38.59,112.78 38.13,113.24 37.81,113.24 37.4,113.65 37.4,113.97 36.56,114.81 17.3,114.81 15.49,116.62 15.49,153.59 16.4,154.5 16.4,164.04 17.9,165.54 33.12,165.54 CON2.6
CURR-SENSE  (via drill 0.35)
  Top 0.2: IC1.14 24.31,95.27 24.21,95.37 O8.P$1 T39.P$1 20.81,95.37 20.31,95.87 C66.1 19.51,96.77 19.51,98.07 19.11,98.47 18.51,98.47 17.21,99.77 17.21,107.56 12.29,112.48 12.29,159.62 12.94,160.27 12.94,160.87 12.51,161.29 12.25,161.29 11.89,161.66 11.89,162.71 v12.21,163.04
  Top 0.3: R102.2 12.59,184.67 v12.48,184.56
  Bottom 0.2: 12.21,163.29 v12.21,163.04 12.21,163.48 7.84,167.85 7.84,177.93 9.03,179.12 9.03,180.03 7.84,181.22 7.84,183.38 9.02,184.56 v12.48,184.56
D_N  (via drill 0.3)
  Top 0.2: v53.15,87.5 52.85,87.5 52.85,87.21 52.41,86.77 51.23,86.77 IC15.2 51.06,86.99 50.11,87.94 45.42,87.94 44.37,88.99 44.37,91.72 43.79,92.3 41.27,92.3 41.24,92.27 IC1.56
  Bottom 0.2: J12.2_D- 56.61,87.8 57.25,87.16 57.25,86.41 56.88,86.05 56.28,86.05 arc-90 56.08,86.25 56.08,86.28 arc90 55.88,86.48 55.84,86.48 arc90 55.64,86.28 55.64,86.25 arc-90 55.44,86.05 55.4,86.05 arc-90 55.2,86.25 55.2,86.28 arc90 55,86.48 54.97,86.48 arc90 54.77,86.28 54.77,86.25 arc-90 54.57,86.05 54.53,86.05 arc-90 54.33,86.25 54.33,86.28 arc90 54.13,86.48 54.09,86.48 arc90 53.89,86.28 53.89,86.25 arc-90 53.69,86.05 53.38,86.05 52.85,86.58 52.85,87.5 v53.15,87.5
D_P  (via drill 0.3)
  Top 0.2: v52.15,87.5 52.45,87.5 52.45,88.54 51.65,89.34 IC15.3 51.06,89.29 50.11,88.34 45.59,88.34 44.77,89.16 44.77,91.89 43.96,92.7 41.27,92.7 41.2,92.77 IC1.57
  Bottom 0.2: J12.3_D+ 58.29,87.8 57.65,87.16 57.65,86.24 57.05,85.65 53.21,85.65 52.45,86.41 52.45,87.5 v52.15,87.5
DGND  (via drill 0.3 pad 0.7, 0.3 pad 0.8)  (1 unrouted)
  Top 0.152: IC3.10
  Top 0.2: R96.2 C62.2 10.43,179.58 v10.63,179.38 v10.63,178.68 9.53,178.68 C63.2 R99.2 | C58.2 C59.2 | 38.64,173.97 39.34,174.67 R40.1 39.24,174.67 v38.54,175.37 38.44,175.47 R43.1 | R71.2 v13.74,194.27 | v39.44,177.47 R41.2 | v7.14,195.67 C41.2 | C86.- 5.34,194.97 6.34,195.97 v6.34,196.07 | v7.64,202.87 7.64,202.12 IC12.5 8.73,202.07 8.74,202.07 v8.84,202.07 | R48.1 38.64,173.97 | R21.2 48.14,180.97 47.44,181.67 44.34,181.67 42.84,180.17 42.84,178.57 43.04,178.37 46.04,178.37 46.04,177.37 | C51.2 v21.81,106.07 | R44.2 v38.54,172.47 38.64,172.57 38.64,173.97 | C40.2 8.61,81.07 8.27,81.41 C81.- | 27.61,78.27 27.61,79.77 27.71,79.87 | IC11.4 62.31,117.92 v62.31,117.97 62.31,117.27 | IC11.3 62.31,117.27 | 62.31,117.27 v62.31,115.97 | IC7.1 62.31,110.72 v62.31,110.77 62.31,111.37 | IC7.2 62.31,111.37 | IC7.3 62.31,112.02 | 62.31,112.02 62.31,111.37 | IC7.4 v62.31,112.67 | v62.31,112.67 62.31,112.02 | IC11.1 v62.31,115.97 | v62.31,115.97 62.31,114.27 | 62.31,114.27 v62.31,112.67 | C28.2 62.31,114.27 | v22.41,82.77 C64.2 | v50.51,100.47 50.71,100.47
  Top 0.28: IC1.45 36.21,88.97 v35.71,89.47 | v31.21,89.47 31.71,88.97 IC1.36 | IC1.31 v29.21,89.47 | IC1.15 25.91,94.77 v26.41,95.27 | IC1.75 39.31,101.77 v39.01,102.07 | C51.2 v20.91,106.87 | 42.61,96.87 42.51,96.77 IC1.65 v39.01,96.77
  Top 0.3: IC3.10 48.54,174.87 | R19.2 R21.2 | C24.1 45.44,171.47 47.04,171.47 R17.2 48.59,173.02 | v39.11,83.97 C48.2 v38.31,84.87
  Top 0.4: IC3.EP 48.54,175.97 47.74,176.77 47.74,178.87 R19.2 | v49.24,177.27 48.84,177.27 v48.54,177.27 | IC6.2 v53.14,165.47 v53.14,164.17 53.14,163.27 C35.2 R46.1 | IC16.4 v10.63,178.68 | v10.33,172.68 10.43,172.58 C67.2 10.63,173.08 v10.63,173.48 | IC10.2 13.34,189.17 v13.74,189.57 v13.74,190.17 13.69,190.12 IC10.1 | IC13.3 v25.21,79.87 27.71,79.87 C88.2 v28.51,81.97 | C59.2 v27.31,75.67 28.71,75.67 28.91,75.87 v29.11,75.87 C56.- | 49.81,104.77 50.71,103.87 50.71,100.47 50.71,97.37 49.71,96.37 | 42.61,96.87 45.61,99.87 45.61,103.27 46.41,104.07 v46.71,104.07 46.71,104.37 47.71,105.37 49.21,105.37 49.81,104.77 | 49.81,104.77 C61.2 | 49.71,96.37 48.81,95.47 C47.2 v45.71,96.37 | 49.71,96.37 C60.2 | v54.54,167.87 54.74,168.07 59.74,168.07 60.24,168.57 60.24,179.52 | C49.2 v32.11,81.97 v32.71,81.97 | C57.2 27.01,82.07 | 27.01,82.07 v27.01,81.97 | C55.2 v28.51,81.97 | v28.51,81.97 27.11,81.97 27.01,82.07 | 27.61,78.27 C58.2 v27.31,77.17 | v25.81,87.17 25.51,86.87 23.81,86.87 21.61,84.67 21.61,82.77 v22.41,82.77 | C64.2 v24.11,81.97 v24.81,81.97 C36.2 C64.2
  Top 0.5: 45,148.66 45,148.68 44.96,148.72 v44.96,147.92 44.96,148.92 | 44.96,148.92 v44.96,150.12 | L2.2 45.1,148.92 44.96,148.92
  Top 0.8: v39.01,102.07 v36.41,102.07 | v47.84,174.47 v48.54,174.47 v49.24,174.47 | L12.1 34.54,182.17 33.54,182.17 v33.54,182.47 | v33.54,182.47 v33.54,181.87 v33.54,181.27 34.54,181.27 | v33.54,182.47 v33.54,183.07 | C29.2 v22.44,188.17 v22.44,188.77 v22.44,190.67 v22.44,191.27 22.44,192.47 C83.2 | v34.91,109.57 C54.- | v35.91,109.27 36.51,109.87 C53.2 35.91,109.87 35.21,110.57 C54.- | v33.91,108.77 C52.2 33.01,109.17 34.41,110.57 C54.- | 40.01,104.37 40.01,103.07 v39.01,102.07 | C31.- v45.12,169.07 44.74,169.07 44.44,169.37 43.95,169.37 D2.- | v31.21,89.47 v29.21,89.47 | v35.71,89.47 v33.21,89.47 | v39.01,96.77 v39.01,102.07 | v26.41,95.27 v26.41,97.27 v26.41,99.87 | C50.2 19.41,94.47 v18.91,94.97 18.71,95.17 C66.2 18.71,96.77 | 18.71,96.77 C65.2 | v18.11,96.72 18.66,96.72 18.71,96.77 | v9.81,84.41 C81.- v10.11,82.87 | v55.14,188.77 55.14,191.17 C84.2 55.94,191.17 v55.94,188.77 v55.14,188.77
  Top 0.813: v48.74,169.07 C31.-
  Top 1.2: 48.54,174.87 IC3.EP 48.54,176.37 48.64,176.47 arc90 48.74,176.57 48.74,176.97 48.84,176.97 | v48.54,174.47 48.54,173.07 48.59,173.02 C30.2 49.54,171.71 C31.- | 53.24,180.07 C23.2 C22.2 56.99,180.17 58.34,181.52 D7.A
  Top 1.4: 53.24,180.07 52.04,178.87 50.14,178.87 48.84,177.57 48.84,177.27 48.84,176.97
  Top 1.6: 48.54,174.87 v48.54,174.47
  Bottom 0.2: 40.04,178.07 v39.44,177.47 | v38.54,175.37 38.54,174.82 v38.44,174.72 | 13.74,190.07 v13.74,189.57 | 13.74,195.67 v13.74,194.27 13.74,193.37 | v7.64,202.87 7.64,202.07 6.34,202.07 v6.34,196.07 6.34,195.67 v7.14,195.67 | v13.74,190.17 13.74,190.87 22.24,190.87 v22.44,190.67 | 59.73,188.77 v55.94,188.77 | 31.91,108.77 v33.91,108.77
  Bottom 0.28: v26.41,95.27 25.91,94.77 | v39.11,83.97 36.21,83.97 36.21,88.97 v35.71,89.47 | v32.11,81.97 31.71,81.97 31.71,88.97 v31.21,89.47 | v28.51,81.97 29.21,81.97 v29.21,89.47
  Bottom 0.4: v10.63,173.48 v10.63,178.68 | v48.74,169.07 51.34,169.07 53.14,167.27 | v24.81,81.97 25.21,81.97 | 25.21,81.97 v27.01,81.97 | 25.21,81.97 v25.21,79.87 25.21,79.27 v27.31,77.17 27.81,77.17 v29.11,75.87 | 53.14,167.27 v53.14,165.47 | v54.54,167.87 53.94,167.27 53.14,167.27 | v45.71,96.37 45.31,96.77 v39.01,96.77
  Bottom 0.8: J17.3 15.31,76.27 10.11,81.47 v10.11,82.87 | 22.44,206.47 22.44,201.17 | 22.44,201.17 22.44,196.77 23.94,195.27 23.94,194.07 22.44,192.57 v22.44,191.27 v22.44,190.67 v22.44,188.77 v22.44,188.17 27.54,183.07 v33.54,183.07 34.64,183.07 39.94,188.37 | 38.84,210.27 38.84,204.77 35.24,201.17 22.44,201.17 | 34.91,102.07 v36.41,102.07 | 42.24,173.37 44.74,175.87 47.14,175.87 v48.54,177.27 | 34.91,102.07 34.91,97.27 | 34.91,97.27 34.91,89.47 v35.71,89.47 | v33.21,89.47 v31.21,89.47 | v18.11,96.72 18.96,96.72 19.51,97.27 v26.41,97.27 34.91,97.27 | 20.51,106.47 v20.91,106.87 | 34.91,102.07 v34.91,109.57
  other vias: 23.51,106.07 46.31,92.98 40.51,88.47 26.41,92.47 39.01,92.97 30.41,102.07 24.34,200.67 15.31,75.67 28.71,91.77 59.94,183.87 52.94,162.17 7.93,179.58 9.63,182.08 43.32,168.47 57.15,152.39 50.8,152.39 38.1,57.14 38.1,69.84 25.4,57.14 25.4,69.84 12.7,69.84 25.4,44.44 12.7,57.14 12.7,44.44 12.7,38.09 25.4,38.09 38.1,38.09 38.1,44.44 50.8,44.44 50.8,57.14 50.8,69.84 6.35,69.84 6.35,57.14 50.8,38.09 57.15,38.09 57.15,57.14 57.15,69.84 6.35,95.24 6.35,107.94 6.35,120.64 6.35,146.04 25.4,120.64 38.1,120.64 12.7,25.39 12.7,6.34 25.4,25.39 38.1,25.39 50.8,25.39 50.8,6.34 29.71,105.17 27.51,104.87 21.91,111.67 19.91,117.27 9.71,117.07 21.71,109.27 13.41,106.07 22.71,100.07 28.91,99.47 40.61,104.57 41.91,99.27 54.61,101.27 54.61,105.97 44.91,106.17 31.84,180.67 18,151.64 18,149.64 18,139.64 18,137.64 18,135.64 18,133.64 18,131.64 18,129.64 18,127.64 18,125.64 33,125.64 35,125.64 37,126.64 39,128.64 42,130.64 48,137.64 45,139.64 45,141.64 46,140.64 46,153.64 38,159.64 36,159.64 34,159.64 32,159.64 30,159.64 28,159.64 26,159.64 24,159.64 22,159.64 20,159.64 7,140.64 7,144.64 11,109.64 13,107.64 10,112.64 10,114.64 10,119.64 36,97.64 37,97.64 36,96.64 37,96.64 20.7,164.04 20.6,166.94 13.9,166.74 38.8,167.34 35.8,168.14 39.2,161.74 35.8,163.04 31.6,164.04 31.9,167.24 32.1,161.84 18,169.04 24.4,169.34 20.9,162.24 26.8,164.24 26.9,162.14 9.3,154.54 4.5,157.04 9.4,164.34 10.6,169.44 55.21,109.57 52.5,204.54
  pour Top (isolate 0.254, rank 2): 0,-0.01 19.05,-0.01 19.05,19.06 44.45,19.06 44.45,0 63.51,0 63.51,226.83 0,226.83
  pour Bottom (isolate 0.254, rank 2): 0,-0.01 19.05,-0.01 19.05,19.06 44.45,19.06 44.45,0 63.51,0 63.51,226.83 0,226.83
DGND-F
  Top 0.4: J4.7 35.02,213.77 35.02,218.35 34.21,219.17 31.34,219.17 IC14.1 30.63,221.22 C39.2
  Top 0.8: L12.2 37.94,181.97 37.94,182.47 38.04,182.57 38.04,184.37 38.74,185.07
  Top 1: D4.A 38.74,185.07 38.14,185.07 38.14,186.32 J3.8 34.92,189.53 J3.7 34.91,194.79 34.14,195.57 34.14,200.87 34.91,201.64 34.91,209.85 J4.8 34.92,212.4 J4.7 | 28.56,185.64 28.57,185.64 | 28.57,185.64 D3.A | J3.2 28.57,185.64
  Bottom 1: J3.2 30.27,186.57 34.47,186.57 36.17,188.26 J3.8 | J4.2 30.46,209.24 34.4,209.24 36.19,211.03 J4.8
DOOR_L  (via drill 0.3)
  Top 0.2: R50.2 25.06,129.52 25.26,129.32 25.86,129.32 | R50.3 25.86,129.32 | IC1.51 41.97,89.77 v43.2,88.54 | v17.97,116.82 17.97,116.87 17.3,117.55 17.3,118.13 17.6,118.43 17.6,123.6 18.93,124.94 24.6,124.94 25.86,126.2 25.86,129.32
  Bottom 0.2: v43.2,88.54 43.2,83.44 41.9,82.14 36.4,82.14 34.21,84.33 34.21,90.23 33.7,90.74 24.8,90.74 24.2,91.34 21.9,91.34 20.7,90.14 20.7,88.34 19.9,87.54 19.3,87.54 18.8,88.04 18.8,92.44 19,92.64 19,93.74 18.19,94.54 17.2,94.54 16.7,94.04 15.8,94.04 14.81,95.03 14.81,100.03 15.11,100.33 15.11,115.51 17.3,117.7 17.3,118.13 17.71,118.54 18.29,118.54 18.7,118.13 18.7,117.55 v17.97,116.82
DOOR_L_SW  (via drill 0.3, 0.3 pad 0.7)
  Top 0.2: J14.4 40.9,155.88 39.76,157.02 22.26,157.02 21.56,156.32 21.56,153.72 21.96,153.32 21.96,149.62 21.76,149.42 21.76,148.62 21.96,148.42 21.96,147.82 | R50.7 25.06,132.42 26.16,133.52 26.16,135.82 25.36,136.62 25.36,139.42 24.56,140.22 24.56,140.42 22.86,142.12 22.86,144.03 22.87,144.03 R6.2 v22.96,145.22 | 21.96,147.82 21.96,145.72 21.56,145.32 v21.56,145.22 | C12.1 21.96,147.82 | v56.92,149.89 54.02,149.89 v53.92,149.99
  Bottom 0.2: v21.56,145.22 v22.96,145.22 | J1.1 17.78,27.77 18.4,28.39 58.83,28.39 59.61,29.17 59.61,32.42 58.35,33.69 57.91,33.69 52.78,38.82 52.78,70.47 61,78.69 61,97.69 58.5,100.19 58.5,113.97 56.81,115.66 56.81,120.18 56.8,120.19 | 56.8,119.69 56.8,120.19 | 56.8,120.19 56.8,124.79 55.13,126.46 55.13,133.48 56.62,134.97 56.62,149.59 v56.92,149.89 | v53.92,149.99 53.92,150.8 52.91,151.81 52.91,152.23 47.66,157.49 42.77,157.49 J14.4
DOOR_ON  (via drill 0.3)
  Top 0.2: R9.7 22.86,134.52 | 22.86,134.52 Q3.5 21.65,134.52 | 22.86,134.52 22.86,133.92 22.76,133.82 v22.76,126.54 22.76,126.52 | IC1.89 32.21,105.2 31.11,106.3 31.11,107.93 28.12,110.92 v27.7,110.92
  Bottom 0.2: v27.7,110.92 27.7,114.44 22.3,119.84 22.3,126.08 v22.76,126.54
DOOR_R  (via drill 0.3)
  Top 0.2: R50.1 24.26,130.72 24.46,130.92 26.46,130.92 26.66,130.72 R50.4 26.66,129.32 27.06,128.92 27.06,125.9 25.7,124.54 19.1,124.54 18,123.44 v18,117.84 | IC1.23 23.9,90.77 23.5,91.17 16.05,91.17 15.31,91.91 15.31,99.54 v15.51,99.74
  Bottom 0.2: v15.51,99.74 15.51,115.35 v18,117.84
DOOR_R_SW  (via drill 0.3, 0.3 pad 0.7)
  Top 0.2: J15.4 27.9,154.86 25.06,152.02 v25.06,151.82 | R50.8 24.26,132.52 24.66,132.92 24.96,132.92 25.76,133.72 25.76,135.62 24.96,136.42 24.96,139.22 24.16,140.02 24.16,140.22 22.06,142.32 R8.2 22.14,142.6 22.16,142.6 22.16,144.72 22.26,144.82 22.26,145.42 22.64,145.8 C4.1 22.86,146.22 23.36,146.72 23.36,148.52 23.16,148.72 22.96,148.72 22.66,149.02 v22.66,149.12 | v53.61,152.1 v53.62,152.09 53.62,151.1 54.03,150.69 54.61,150.69 54.8,150.89 v56.92,150.89
  Bottom 0.2: v25.06,151.82 22.66,149.42 v22.66,149.12 | J7.1 43.18,27.27 43.9,27.99 59,27.99 60.01,29 60.01,32.59 58.51,34.09 58.08,34.09 53.18,38.99 53.18,70.3 61.4,78.52 61.4,97.85 58.9,100.35 58.9,114.13 57.21,115.82 57.21,120.34 57.2,120.35 57.2,124.96 55.53,126.63 55.53,133.3 55.8,133.57 55.8,133.59 57.02,134.81 57.02,149 57.62,149.6 57.62,150.19 v56.92,150.89 | v53.61,152.1 47.82,157.89 30.17,157.89 J15.4
GATE-Q12A
  Top 0.2: Q5.1 31.34,177.27 C33.2 R42.2 35.74,176.37 35.74,178.17 36.04,178.47 37.34,178.47 37.69,178.12 Q4.6
GATE-Q12A1
  Top 0.2: Q6.6 50.71,146.05 49.96,145.3 49.96,143.68 48.93,142.66 | Q7.1 47.31,143.11 47.46,142.96 48.64,142.96 48.93,142.66 | 48.93,142.66 48.96,142.64 48.96,141.97
  Top 0.5: C8.2 48.96,141.97 R13.2
GATE-Q12B
  Top 0.2: Q5.3 32.99,179.62 C34.2 R45.2 34.94,179.67 Q4.3
LAN-CTL  (via drill 0.35)
  Top 0.2: IC12.3 13.08,200.77 13.94,200.77 14.07,200.63 14.07,199.53 | IC1.84 34.71,104.87 O31.P$1 T15.P$1 37.17,107.33 37.51,107.33 37.79,107.61 37.79,112.13 36.6,113.32 36.6,113.64 36.23,114.01 16.94,114.01 14.69,116.26 14.69,153.92 15.34,154.57 15.34,157.16 14.14,158.36 14.14,158.82 13.83,159.13 v13.83,159.57 | 14.07,199.53 14.64,198.97 14.64,197.57 R71.1 13.44,196.67 13.44,196.27 12.84,195.67 12.84,193.87 v12.76,193.79 | 14.07,199.53 IC12.2
  Bottom 0.2: v12.76,193.79 12.44,193.47 12.44,192.93 8.54,189.02 8.54,184.65 7.44,183.55 7.44,181.06 8.63,179.87 8.63,179.29 7.44,178.1 7.44,164.4 8.73,163.11 8.73,159.32 9.13,158.92 12.79,158.92 13.11,159.24 13.5,159.24 v13.83,159.57
LAN-RX  (via drill 0.35)
  Top 0.2: IC12.1 12.13,198.26 11.64,197.77 R72.2 10.84,195.77 10.84,193.43 v10.57,193.16 | IC1.88 32.71,105.27 31.51,106.47 O29.P$1 T13.P$1 31.51,108.1 26.91,112.7 15.64,112.7 13.89,114.45 13.89,154.25 14.54,154.9 14.54,156.32 13.41,157.45 v13.41,157.47
  Bottom 0.2: v10.57,193.16 7.74,190.33 7.74,184.98 6.64,183.88 6.64,164.07 7.93,162.78 7.93,158.99 9.45,157.47 v13.41,157.47
LAN-TX  (via drill 0.35)